# EAGLE board SchematicV4 (EAGLE 7.7.0)
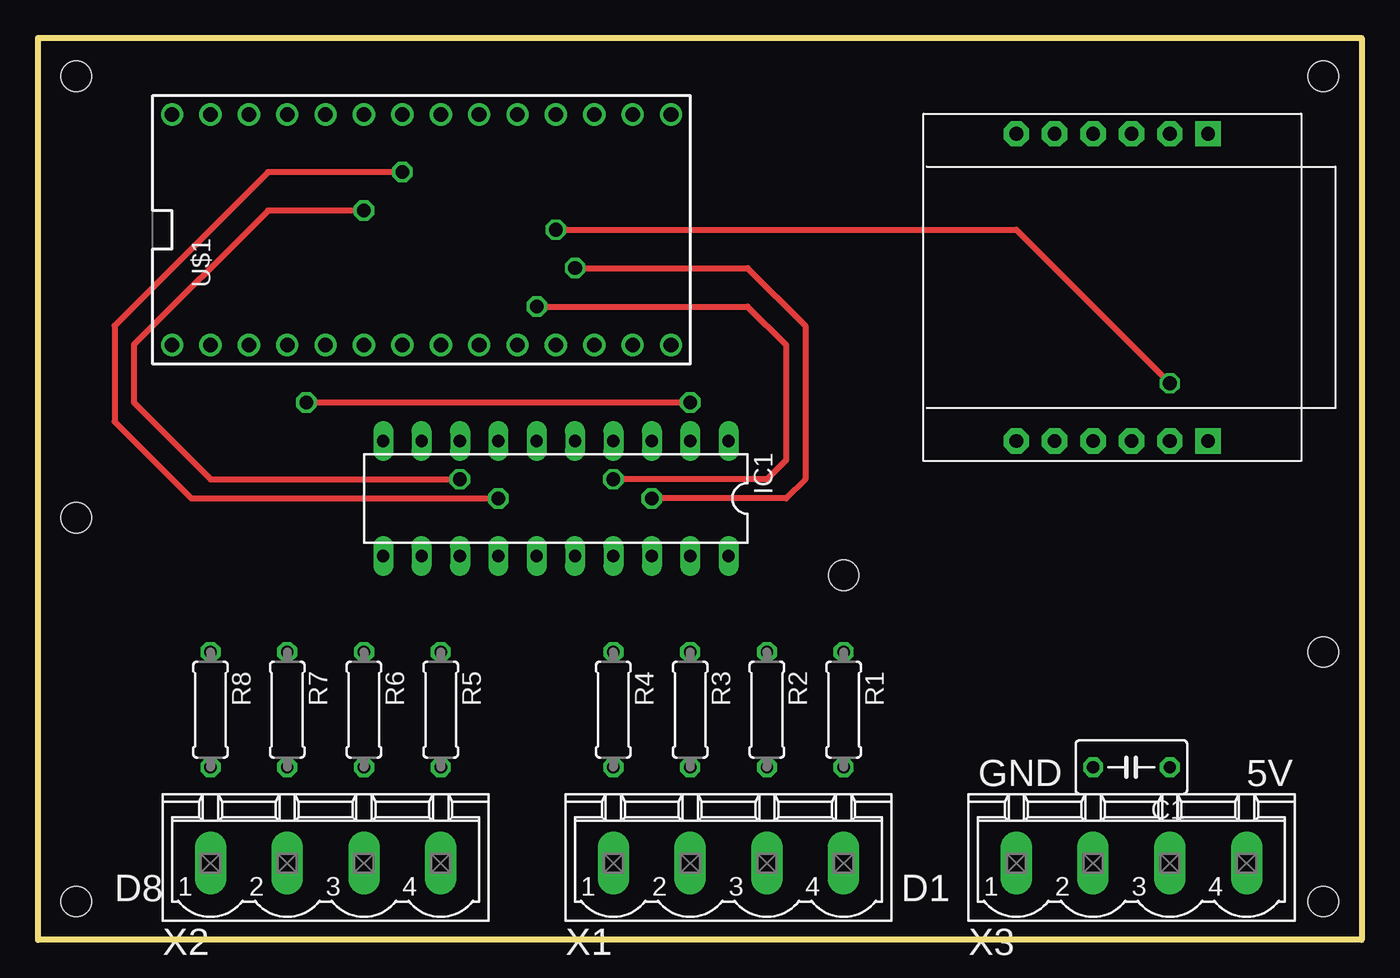
[diagram p0: board, top side]
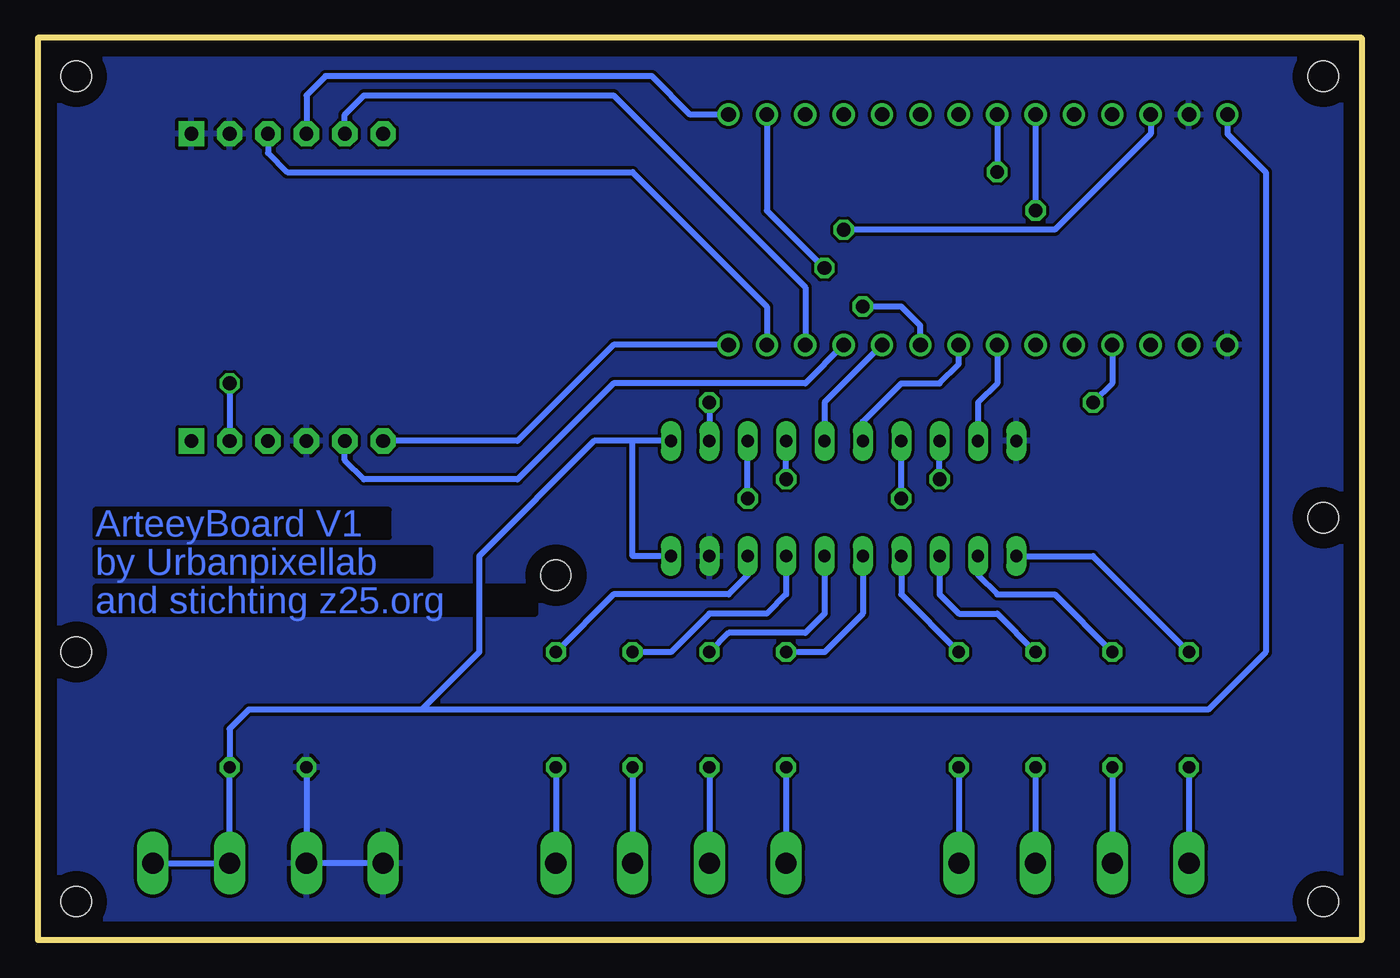
[diagram p1: board, bottom side, seen from below]

Size 87.63 x 59.69 mm. Coordinates in mm from the lower left corner, seen from the top.
Outline: 0,59.69 87.63,59.69 87.63,0 0,0 0,59.69
Copper layers (1*16): Top 0.035mm / dielectric 1.5mm / Bottom 0.035mm
Design rules "default": minimum track width 10mil, minimum drill 24mil, track to track 8mil, track to pad 8mil, pad to pad 8mil, via to via 8mil, smd to smd 8mil, copper to edge 40mil, drill to drill 8mil, minimum pad ring 10mil, minimum via ring 8mil, stop-mask expansion 4mil, vias tented up to drill 0mil, thermal gap 10mil
Holes 2 mm at 2.54,57.15 85.09,57.15 85.09,2.54 2.54,2.54 85.09,19.05 2.54,27.94 53.34,24.13

## Footprints (pad centres in the part's own frame; a part is rotated, then mirrored left to right if it is on the bottom)
C050-035X075 = drill 0.813 octagon: 1 -2.54,0; 2 2.54,0
DIL20 = drill 0.813 long: 1 -11.43,-3.81; 2 -8.89,-3.81; 3 -6.35,-3.81; 4 -3.81,-3.81; 5 -1.27,-3.81; 6 1.27,-3.81; 7 3.81,-3.81; 8 6.35,-3.81; 9 8.89,-3.81; 10 11.43,-3.81; 11 11.43,3.81; 12 8.89,3.81; 13 6.35,3.81; 14 3.81,3.81; 15 1.27,3.81; 16 -1.27,3.81; 17 -3.81,3.81; 18 -6.35,3.81; 19 -8.89,3.81; 20 -11.43,3.81
WIZ820IO = drill 0.9 pad 1.676 square: J1.1 -10.16,6.35; J2.1 10.16,6.35 | drill 0.9 pad 1.676 octagon: J1.2 -10.16,3.81; J1.3 -10.16,1.27; J1.4 -10.16,-1.27; J1.5 -10.16,-3.81; J1.6 -10.16,-6.35; J2.2 10.16,3.81; J2.3 10.16,1.27; J2.4 10.16,-1.27; J2.5 10.16,-3.81; J2.6 10.16,-6.35
0207/7 = drill 0.813 octagon: 1 -3.81,0; 2 3.81,0
TEENSY_3.0-3.2&LC_DIL = drill 0.965: 0 -7.62,13.97; 1 -7.62,11.43; 2 -7.62,8.89; 3 -7.62,6.35; 3.3V 7.62,11.43; 4 -7.62,3.81; 5 -7.62,1.27; 6 -7.62,-1.27; 7 -7.62,-3.81; 8 -7.62,-6.35; 9 -7.62,-8.89; 10 -7.62,-11.43; 11 -7.62,-13.97; 12 -7.62,-16.51; 13 7.62,-16.51; 14/A0 7.62,-13.97; 15/A1 7.62,-11.43; 16/A2 7.62,-8.89; 17/A3 7.62,-6.35; 18/A4 7.62,-3.81; 19/A5 7.62,-1.27; 20/A6 7.62,1.27; 21/A7 7.62,3.81; 22/A8 7.62,6.35; 23/A9 7.62,8.89; AGND 7.62,13.97; GND -7.62,16.51; VIN 7.62,16.51
MSTBV4 = drill 1.397 long: 1 -7.62,0; 2 -2.54,0; 3 2.54,0; 4 7.62,0

## Placement (x,y rotation side)
C1  1uF  [C050-035X075]  72.39,11.43 180 top
IC1  74LS245N  [DIL20]  34.29,29.21 180 top
IC2  WIZ820io  [WIZ820IO]  71.12,43.18 270 top
R1  100  [0207/7]  53.34,15.24 270 top
R2  100  [0207/7]  48.26,15.24 270 top
R3  100  [0207/7]  43.18,15.24 270 top
R4  100  [0207/7]  38.1,15.24 270 top
R5  100  [0207/7]  26.67,15.24 270 top
R6  100  [0207/7]  21.59,15.24 270 top
R7  100  [0207/7]  16.51,15.24 270 top
R8  100  [0207/7]  11.43,15.24 270 top
U$1  TEENSY_3.1-3.2_DIL  [TEENSY_3.0-3.2&LC_DIL]  25.4,46.99 90 top
X1  MSTBV4  [MSTBV4]  45.72,5.08 0 top
X2  MSTBV4  [MSTBV4]  19.05,5.08 0 top
X3  MSTBV4  [MSTBV4]  72.39,5.08 0 top

## Library data of the parts
C1 R1-R8 = resistor
IC1 = 74xx-us
IC2 = Wiz820io
U$1 = Teensy_3_and_LC_Series_Boards_v1.4
X1-X3 = con-phoenix-508; MPN: MSTBV 2,5/4-GF-5.08; OC_FARNELL: 1792794; OC_NEWARK: 69R9847

## Nets
+5V: C1.1 IC1.1 IC1.20 U$1.VIN X3.3 X3.4
GND: C1.2 IC1.10 IC1.19 IC2.J1.1 IC2.J1.2 IC2.J2.4 U$1.AGND U$1.GND X3.1 X3.2
GND3: IC2.J2.1
N$1: IC1.18 R1.1
N$2: IC1.17 R2.1
N$3: IC1.16 R3.1
N$4: IC1.15 R4.1
N$5: IC1.14 R5.1
N$6: IC1.13 R6.1
N$7: IC1.12 R7.1
N$8: IC1.11 R8.1
N$9: IC1.2 U$1.2
N$10: IC1.3 U$1.14/A0
N$11: IC1.4 U$1.7
N$12: IC1.5 U$1.8
N$13: IC1.6 U$1.6
N$14: IC1.7 U$1.20/A6
N$15: IC1.8 U$1.21/A7
N$16: IC1.9 U$1.5
N$18: IC2.J2.2 U$1.3.3V
N$19: IC2.J2.5 U$1.9
N$20: IC2.J2.6 U$1.12
N$21: IC2.J1.3 U$1.11
N$22: IC2.J1.4 U$1.13
N$23: IC2.J1.5 U$1.10
N$24: R1.2 X1.4
N$25: R2.2 X1.3
N$26: R3.2 X1.2
N$27: R4.2 X1.1
N$28: R5.2 X2.4
N$29: R6.2 X2.3
N$30: R7.2 X2.2
N$31: R8.2 X2.1
VIN2: IC2.J2.3

## Tracks (layer width: path | path; a pad name or v marks a point on that pad's centre or on a via)
+5V
  Bottom 0.406: X3.4 X3.3 C1.1 74.93,13.97 73.66,15.24 62.23,15.24 | U$1.VIN 8.89,53.34 6.35,50.8 6.35,19.05 10.16,15.24 62.23,15.24 | IC1.1 48.26,33.02 | 48.26,33.02 50.8,33.02 58.42,25.4 58.42,19.05 62.23,15.24 | IC1.20 48.26,25.4 48.26,33.02
GND
  Bottom 0.406: C1.2 X3.2 X3.1
  pour Bottom: 1.27,58.42 86.36,58.42 86.36,1.27 1.27,1.27
N$1
  Bottom 0.406: IC1.18 40.64,24.13 41.91,22.86 49.53,22.86 R1.1
N$2
  Bottom 0.406: IC1.17 38.1,22.86 39.37,21.59 43.18,21.59 45.72,19.05 R2.1
N$3
  Bottom 0.406: IC1.16 35.56,21.59 36.83,20.32 41.91,20.32 R3.1
N$4
  Bottom 0.406: IC1.15 33.02,21.59 35.56,19.05 R4.1
N$5
  Bottom 0.406: IC1.14 30.48,22.86 R5.1
N$6
  Bottom 0.406: IC1.13 27.94,22.86 26.67,21.59 24.13,21.59 R6.1
N$7
  Bottom 0.406: IC1.12 25.4,24.13 24.13,22.86 20.32,22.86 R7.1
N$8
  Bottom 0.406: IC1.11 17.78,25.4 R8.1
N$9  (via drill 0.9 pad 0.81)
  Top 0.406: v17.78,35.56 v43.18,35.56
  Bottom 0.406: U$1.2 16.51,36.83 v17.78,35.56 | v43.18,35.56 IC1.2
N$10  (via drill 0.9 pad 0.81)
  Top 0.406: v35.56,44.45 46.99,44.45 50.8,40.64 50.8,30.48 49.53,29.21 v40.64,29.21
  Bottom 0.406: U$1.14/A0 39.37,48.26 v35.56,44.45 | v40.64,29.21 IC1.3
N$11  (via drill 0.9 pad 0.81)
  Top 0.406: v33.02,41.91 46.99,41.91 49.53,39.37 49.53,31.75 48.26,30.48 v38.1,30.48
  Bottom 0.406: U$1.7 29.21,40.64 30.48,41.91 v33.02,41.91 | v38.1,30.48 IC1.4
N$12
  Bottom 0.406: U$1.8 35.56,35.56 IC1.5
N$13
  Bottom 0.406: IC1.6 33.02,34.29 30.48,36.83 27.94,36.83 26.67,38.1 U$1.6
N$14  (via drill 0.9 pad 0.81)
  Top 0.406: v24.13,50.8 15.24,50.8 5.08,40.64 5.08,34.29 10.16,29.21 v30.48,29.21
  Bottom 0.406: U$1.20/A6 v24.13,50.8 | v30.48,29.21 IC1.7
N$15  (via drill 0.9 pad 0.81)
  Top 0.406: v21.59,48.26 15.24,48.26 6.35,39.37 6.35,35.56 11.43,30.48 v27.94,30.48
  Bottom 0.406: U$1.21/A7 v21.59,48.26 | v27.94,30.48 IC1.8
N$16
  Bottom 0.406: U$1.5 24.13,36.83 25.4,35.56 IC1.9
N$18  (via drill 0.9 pad 0.81)
  Top 0.406: v34.29,46.99 64.77,46.99 v74.93,36.83
  Bottom 0.406: U$1.3.3V 13.97,53.34 20.32,46.99 v34.29,46.99 | v74.93,36.83 IC2.J2.2
N$19
  Bottom 0.406: U$1.9 36.83,36.83 49.53,36.83 55.88,30.48 66.04,30.48 67.31,31.75 IC2.J2.5
N$20
  Bottom 0.406: U$1.12 49.53,39.37 55.88,33.02 IC2.J2.6
N$21
  Bottom 0.406: IC2.J1.3 72.39,52.07 71.12,50.8 48.26,50.8 39.37,41.91 U$1.11
N$22
  Bottom 0.406: U$1.13 44.45,54.61 46.99,57.15 68.58,57.15 69.85,55.88 IC2.J1.4
N$23
  Bottom 0.406: IC2.J1.5 67.31,54.61 66.04,55.88 49.53,55.88 36.83,43.18 U$1.10
N$24
  Bottom 0.406: R1.2 X1.4
N$25
  Bottom 0.406: R2.2 X1.3
N$26
  Bottom 0.406: R3.2 X1.2
N$27
  Bottom 0.406: R4.2 X1.1
N$28
  Bottom 0.406: R5.2 X2.4
N$29
  Bottom 0.406: R6.2 X2.3
N$30
  Bottom 0.406: R7.2 X2.2
N$31
  Bottom 0.406: R8.2 X2.1

## Text on the board
Bottom: ArteeyBoard V1 | by Urbanpixellab | and stichting z25.org
tNames: GND | 5V | D8 | D1